# EAGLE board uRings_SE_Front_Panel (EAGLE 9.6.2)
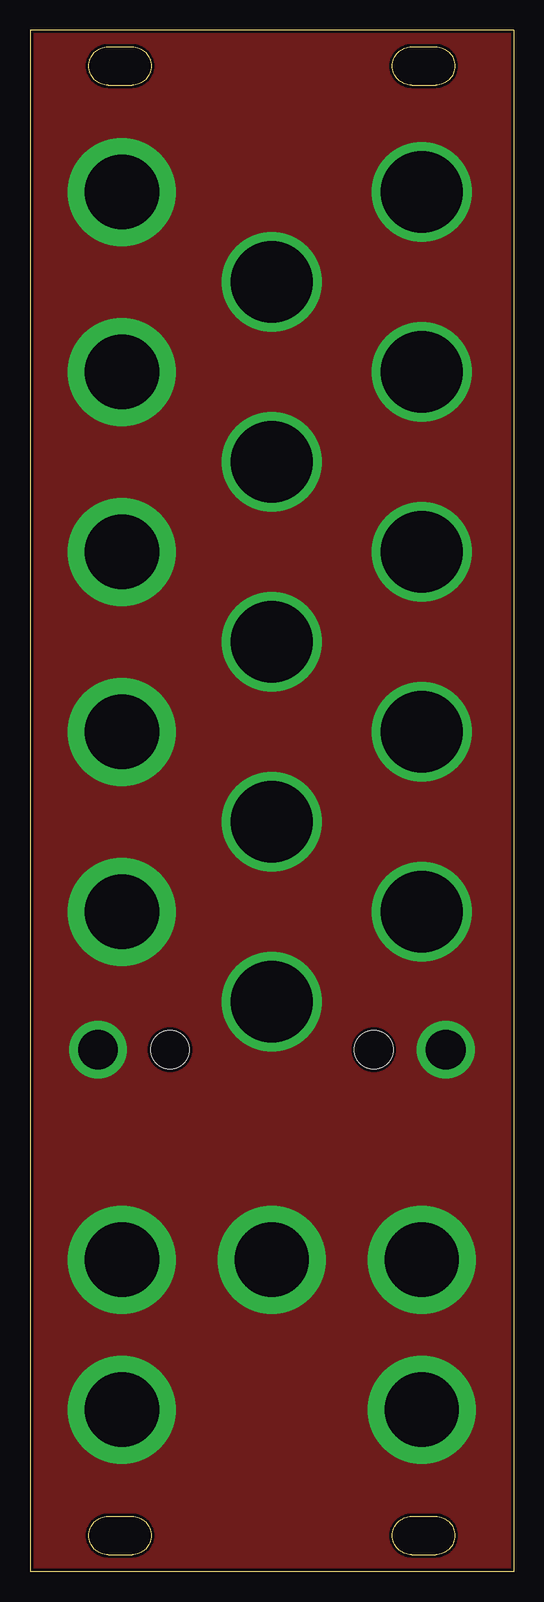
[diagram p0: board, top side]
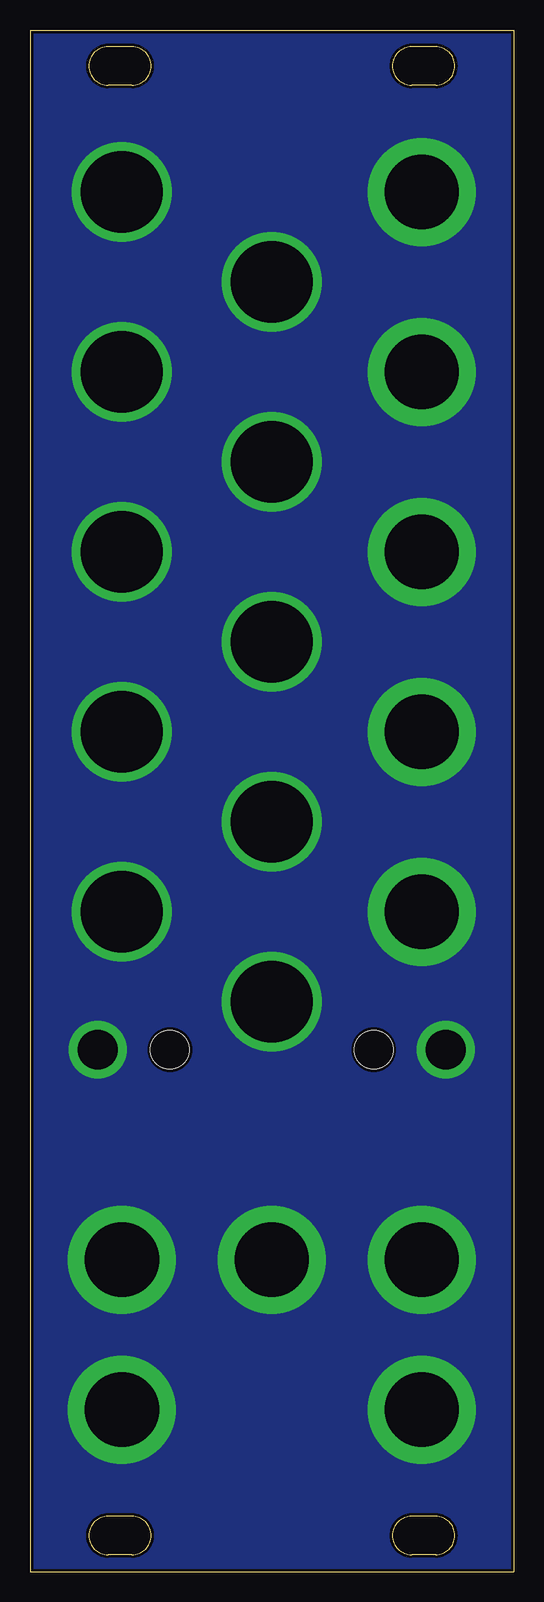
[diagram p1: board, bottom side, seen from below]

Size 40.3 x 128.5 mm. Coordinates in mm from the lower left corner, seen from the top.
Outline: 40.3,128.5 0,128.5 0,0 40.3,0 40.3,128.5
Outline: 6.5,123.9 arc-180 6.5,127.1 8.5,127.1 arc-180 8.5,123.9 6.5,123.9
Outline: 6.5,1.4 arc-180 6.5,4.6 8.5,4.6 arc-180 8.5,1.4 6.5,1.4
Outline: 31.8,1.4 arc-180 31.8,4.6 33.8,4.6 arc-180 33.8,1.4 31.8,1.4
Outline: 31.8,123.9 arc-180 31.8,127.1 33.8,127.1 arc-180 33.8,123.9 31.8,123.9
Copper layers (1*16): Top 0.035mm / dielectric 1.5mm / Bottom 0.035mm
Design rules "default *": minimum track width 10mil, minimum drill 24mil, track to track 8mil, track to pad 8mil, pad to pad 8mil, via to via 8mil, smd to smd 8mil, copper to edge 0.25mm, drill to drill 8mil, minimum pad ring 6mil, minimum via ring 6mil, stop-mask expansion 0mil, vias tented up to drill 0mil, thermal gap 10mil
Holes 3.2 mm at 11.65,43.5 28.65,43.5

## Placement (x,y rotation side)
E$8  [NEG-OUT-EVEN]  25.15,13.5 270 top
E$9  [NEG-OUT-ODD]  15.15,13.5 90 top

## Library data of the parts
E$8 E$9 = uRings_SE_Library

## Tracks (layer width: path | path; a pad name or v marks a point on that pad's centre or on a via)
GND3  (via drill 3.3 pad 4.8, 6.2 pad 9, 6.8 pad 8.3)
  other vias: 7.65,115 7.65,100 7.65,85 7.65,70 7.65,55 32.65,100 32.65,85 32.65,70 32.65,55 20.15,107.5 20.15,62.5 20.15,77.5 20.15,92.5 32.65,115 20.15,47.5 7.65,26 32.65,26 20.15,26 7.65,13.5 32.65,13.5 5.65,43.5 34.65,43.5
  pour Top (no thermals): 0,128.5 40.3,128.5 40.3,0 0,0
  pour Bottom (no thermals): 0,128.5 40.3,128.5 40.3,0 0,0

## Text on the board
tStop: TD-URSE-D | CC BY-SA 4.0 | tall-dog.com | FREQ | STRUCT | BRIGHT | DAMP | POS | POLY | MODE | STRUM | IN | V/OCT | μRings | SE
bStop: μRings SE / Front Panel / TD-URSE-D-FP/B / CC BY-SA 4.0 / 2024-07-21 / tall-dog.com | Panel / derived / from work by / Émilie Gillet / of Mutable / Instruments